# Altium PCB DIO_RJ45_DIOT.PCBDOC (part 6 of 6)
Units mil, origin at the board's own origin, x right, y up, seen from the top; angles counter-clockwise.
Board outline 8758.72 x 3941.04 mil, 4 copper layers (TopLayer, MidLayer1, Internal Plane 1, BottomLayer), stack 46.562 mil thick; 318 components, 196 nets, 1276 pads, 687 vias.
Unrouted connection lines stored in the file: 2.
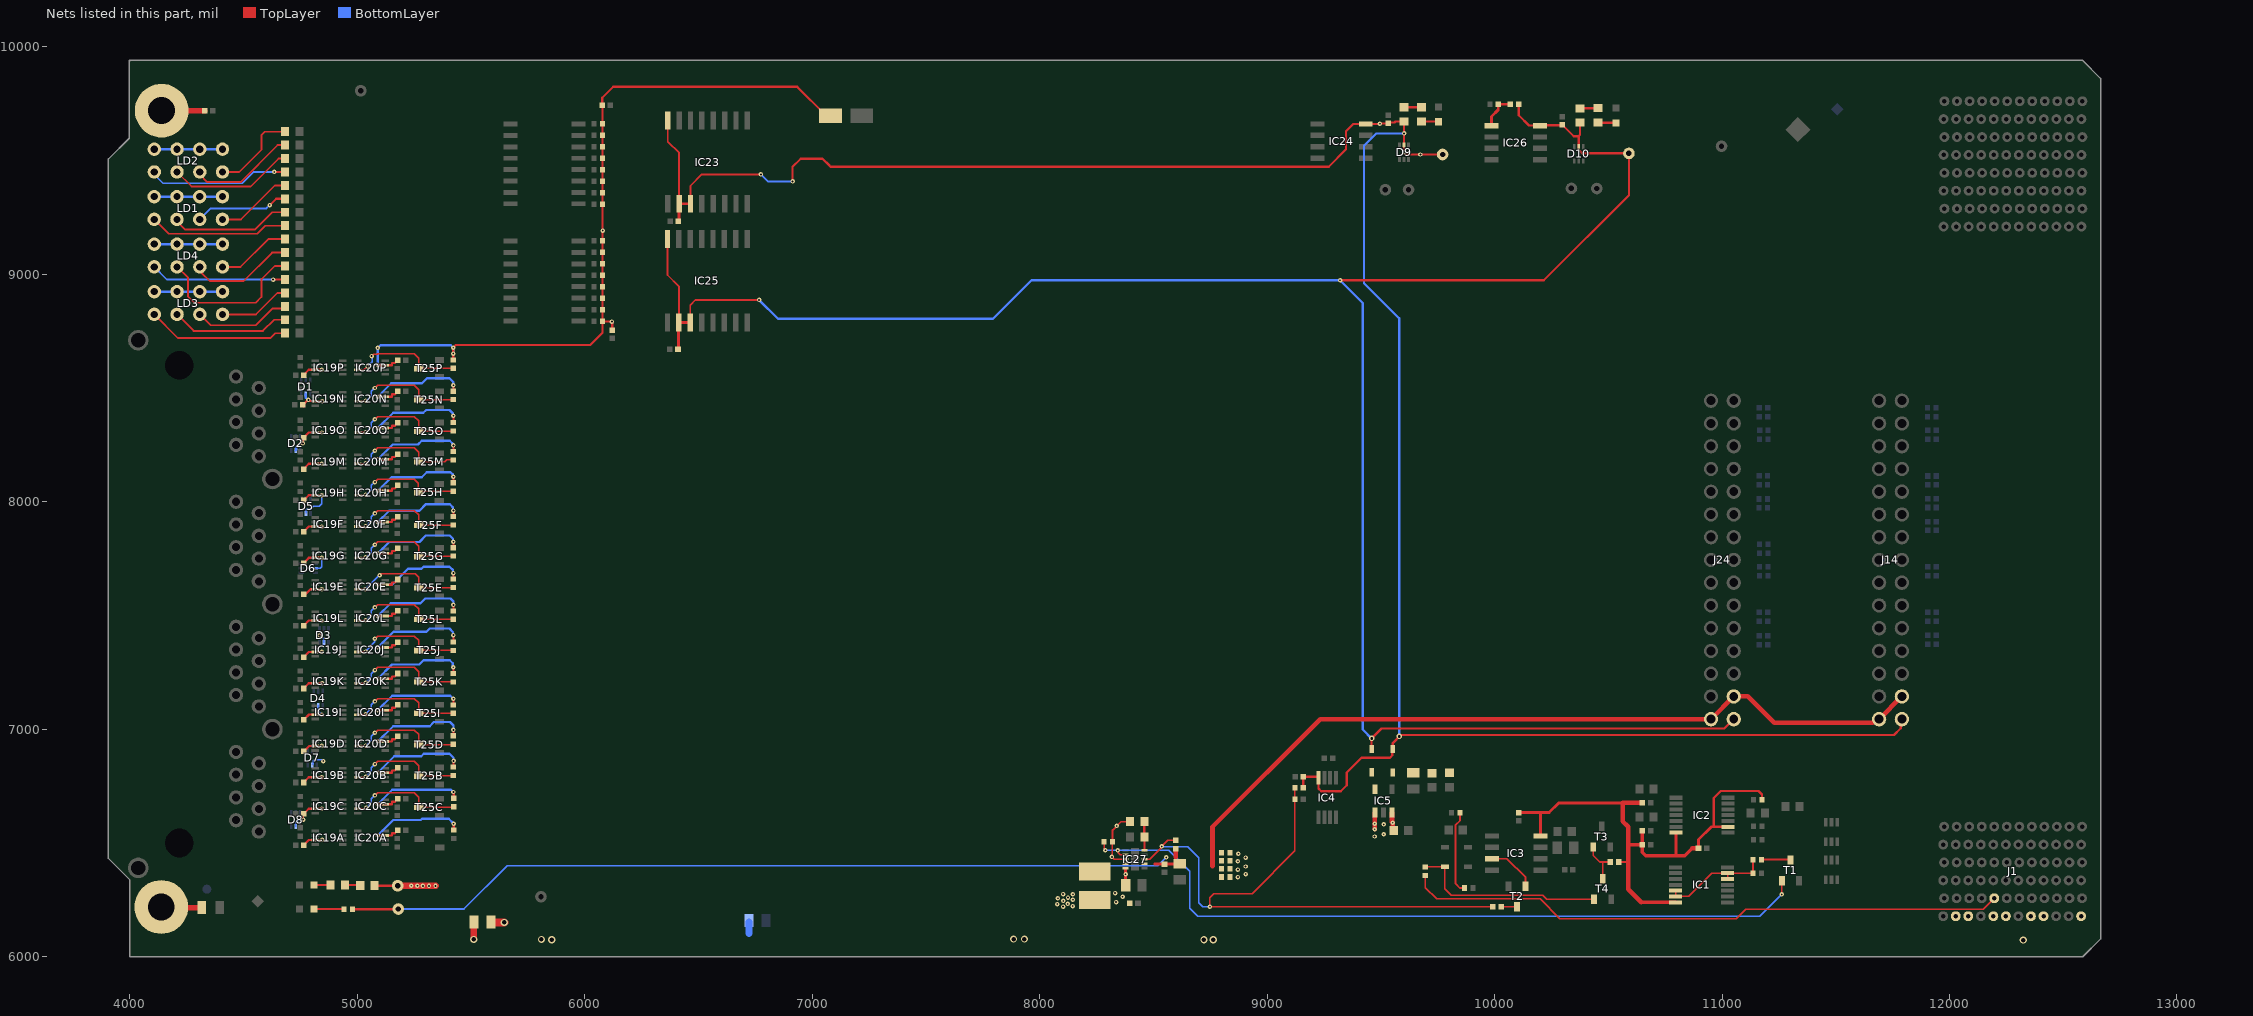
[diagram p7: the nets of this part, all layers, seen from the top]

## Via types
v1: diameter 19.68, hole 7.87, TopLayer to BottomLayer, tented both sides, 672 vias
v2: diameter 31.5, hole 19.68, TopLayer to BottomLayer, 10 vias
v3: diameter 23.62, hole 11.81, TopLayer to BottomLayer, tented both sides, 5 vias

## Nets (pads, with @x,y where several pads share a name; then routed paths per layer and width w, separated by ;. In a path a pad name is that pad's centre, name@x,y a point inside that pad or via, vN(x,y) a via of type N, cw(c..) or ccw(c..) an arc to the next point about the centre after c; other vN are vias at no path point) (continued)
NetIC20B_3: IC20B.3 R133B.1 T25B.3 | length 502.2
  TopLayer w6: IC20B.3@5002.1,6787.79 5035.28,6787.79 v1(5037.13,6789.63) ; v1(5078.13,6845.63) 5090.13,6857.63 5252.13,6857.63 5270.85,6838.91 T25B.3@5270.85,6804.63 ; T25B.3@5271.5,6794.04 R133B.1@5425.2,6794.04
  BottomLayer w6: v1(5037.13,6789.63) 5062.97,6815.47 5062.97,6830.47 v1(5078.13,6845.63)
NetIC20C_3: IC20C.3 R133C.1 T25C.3 | length 502.4
  TopLayer w6: IC20C.3@5002.1,6649.99 5035.82,6649.99 v1(5039.36,6653.53) ; v1(5078.13,6707.83) 5090.13,6719.83 5252.13,6719.83 5270.85,6701.11 T25C.3@5270.85,6666.83 ; T25C.3@5271.62,6656.12 R133C.1@5425.2,6656.12
  BottomLayer w6: v1(5039.36,6653.53) 5062.97,6677.14 5062.97,6692.68 v1(5078.13,6707.83)
NetIC20D_3: IC20D.3 R133D.1 T25D.3 | length 502.2
  TopLayer w6: IC20D.3@5002.1,6925.58 5035.28,6925.58 v1(5037.13,6927.43) ; v1(5078.13,6983.43) 5090.13,6995.43 5252.13,6995.43 5270.85,6976.7 T25D.3@5270.85,6942.43 ; T25D.3@5271.5,6931.83 R133D.1@5425.2,6931.83
  BottomLayer w6: v1(5037.13,6927.43) 5062.97,6953.27 5062.97,6968.27 v1(5078.13,6983.43)
NetIC20E_3: IC20E.3 R133E.1 T25E.3 | length 502.8
  TopLayer w6: IC20E.3@5002.1,7614.56 v1(5035.28,7614.56) ; v1(5098.43,7675.58) 5104.42,7681.58 5256.41,7681.58 5271.5,7666.5 T25E.3@5271.5,7620.81 R133E.1@5425.2,7620.81
  BottomLayer w6: v1(5035.28,7614.56) 5096.31,7675.58 v1(5098.43,7675.58)
NetIC20F_3: IC20F.3 R133F.1 T25F.3 | length 501.8
  TopLayer w6: IC20F.3@5002.1,7890.15 5035.28,7890.15 v1(5037.13,7891.99) ; v1(5078.13,7947.99) 5090.13,7959.99 5252.13,7959.99 5270.85,7941.27 T25F.3@5270.85,7906.99 ; T25F.3@5271.5,7896.4 R133F.1@5422.87,7896.4
  BottomLayer w6: v1(5037.13,7891.99) 5040.48,7891.99 5062.97,7914.48 5062.97,7932.83 v1(5078.13,7947.99)
NetIC20G_3: IC20G.3 R133G.1 T25G.3 | length 501.9
  TopLayer w6: IC20G.3@5002.1,7752.35 5035.28,7752.35 v1(5037.13,7754.2) ; v1(5078.13,7810.2) 5090.13,7822.2 5252.13,7822.2 5270.85,7803.47 T25G.3@5270.85,7769.2 ; T25G.3@5271.5,7758.61 R133G.1@5422.98,7758.61
  BottomLayer w6: v1(5037.13,7754.2) 5040.48,7754.2 5062.97,7776.68 5062.97,7795.04 v1(5078.13,7810.2)
NetIC20H_3: IC20H.3 R133H.1 T25H.3 | length 510.8
  TopLayer w6: IC20H.3@5002.1,8027.94 5035.28,8027.94 v1(5037.13,8029.79) ; v1(5078.13,8085.79) 5090.13,8097.79 5252.13,8097.79 5269.68,8080.23 T25H.3@5269.68,8040.35 ; T25H.3@5271.5,8034.2 5279.37,8034.2 5290.65,8045.47 R133H.1@5423.23,8045.47
  BottomLayer w6: v1(5037.13,8029.79) 5040.48,8029.79 5062.97,8052.27 5062.97,8070.63 v1(5078.13,8085.79)
NetIC20I_3: IC20I.3 R133I.1 T25I.3 | length 502.2
  TopLayer w6: IC20I.3@5002.1,7063.38 5035.28,7063.38 v1(5037.13,7065.22) ; v1(5078.13,7121.22) 5090.13,7133.22 5252.13,7133.22 5270.85,7114.5 T25I.3@5270.85,7080.22 ; T25I.3@5271.5,7069.63 R133I.1@5425.2,7069.63
  BottomLayer w6: v1(5037.13,7065.22) 5054.13,7082.23 5062.97,7091.06 5062.97,7106.06 v1(5078.13,7121.22)
NetIC20J_3: IC20J.3 R133J.1 T25J.3 | length 500.2
  TopLayer w6: IC20J.3@5002.1,7338.97 v1@5035.28,7338.97 ; v1(5078.13,7396.81) 5090.13,7408.81 5252.13,7408.81 5270.85,7390.09 5270.85,7355.81 T25J.3@5271.5,7355.81 ; T25J.3@5271.5,7345.22 R133J.1@5425.2,7345.22
  BottomLayer w6: v1(5037.13,7340.81) 5037.13,7342.5 5078.13,7383.5 v1(5078.13,7396.81)
NetIC20K_3: IC20K.3 R133K.1 T25K.3 | length 502.2
  TopLayer w6: IC20K.3@5002.1,7201.17 5035.28,7201.17 v1(5037.13,7203.02) ; v1(5078.13,7259.02) 5090.13,7271.02 5252.13,7271.02 5270.85,7252.29 T25K.3@5270.85,7218.02 ; T25K.3@5271.5,7207.43 R133K.1@5425.2,7207.43
  BottomLayer w6: v1(5037.13,7203.02) 5062.97,7228.86 5062.97,7243.86 v1(5078.13,7259.02)
NetIC20L_3: IC20L.3 R133L.1 T25L.3 | length 504.2
  TopLayer w6: IC20L.3@5002.1,7476.76 5035.28,7476.76 v1(5037.13,7478.61) ; v1(5078.13,7534.61) 5090.13,7546.61 5252.13,7546.61 5270.85,7527.88 T25L.3@5270.85,7493.61 ; T25L.3@5271.5,7483.02 R133L.1@5425.2,7483.02
  BottomLayer w6: v1(5037.13,7478.61) 5040.48,7478.61 5062.97,7501.09 5062.97,7519.45 v1(5078.13,7534.61)
NetIC20M_3: IC20M.3 R133M.1 T25M.3 | length 512.8
  TopLayer w6: IC20M.3@5002.1,8165.74 5035.28,8165.74 v1(5037.13,8167.58) ; v1(5078.13,8223.58) 5090.13,8235.58 5252.13,8235.58 5270.85,8216.86 T25M.3@5270.85,8175.2 ; T25M.3@5271.65,8175.2 5385.83,8175.2 5393.9,8183.27 R133M.1@5423.23,8183.27
  BottomLayer w6: v1(5037.13,8167.58) 5040.48,8167.58 5062.97,8190.07 5062.97,8208.43 v1(5078.13,8223.58)
NetIC20N_3: IC20N.3 R133N.1 T25N.3 | length 504.2
  TopLayer w6: IC20N.3@5002.1,8441.33 5035.28,8441.33 v1(5037.13,8443.17) ; v1(5078.13,8499.17) 5090.13,8511.17 5252.13,8511.17 5270.85,8492.45 T25N.3@5270.85,8458.17 ; T25N.3@5271.5,8447.58 R133N.1@5425.2,8447.58
  BottomLayer w6: v1(5037.13,8443.17) 5040.48,8443.17 5062.97,8465.66 5062.97,8484.02 v1(5078.13,8499.17)
NetIC20O_3: IC20O.3 R133O.1 T25O.3 | length 504.2
  TopLayer w6: IC20O.3@5002.1,8303.54 5035.28,8303.54 v1(5037.13,8305.38) ; v1(5078.13,8361.38) 5090.13,8373.38 5252.13,8373.38 5270.85,8354.65 T25O.3@5270.85,8320.38 ; T25O.3@5271.5,8309.79 R133O.1@5425.2,8309.79
  BottomLayer w6: v1(5037.13,8305.38) 5040.48,8305.38 5062.97,8327.86 5062.97,8346.22 v1(5078.13,8361.38)
NetIC20P_3: IC20P.3 R133P.1 T25P.3 | length 512.3
  TopLayer w6: IC20P.3@5002.1,8579.13 5029.07,8579.13 5043.49,8593.55 v1(5045.53,8593.55) ; v1(5063.22,8639.37) 5066.92,8639.37 5073.97,8646.41 5087.57,8646.41 5090.13,8648.97 5252.13,8648.97 5270.85,8630.24 T25P.3@5270.85,8595.97 ; T25P.3@5271.5,8585.38 R133P.1@5425.2,8585.38
  BottomLayer w6: v1(5045.53,8593.55) 5066.13,8614.14 5066.13,8620.75 5065.83,8621.04 5065.83,8636.75 v1(5063.22,8639.37)
NetIC26_1: IC26.1 R61.1 R68.1 | length 159.3
  TopLayer w12: IC26.1@9986.51,9652.76 9986.51,9692.22 10016.54,9722.24 R68.1@10016.54,9747.05 R61.1@10069.09,9747.05
NetIC27_5: IC27.5 R121.1 R122.2 | length 125.8
  TopLayer w10: R121.1@8460.63,6592.52 R122.2@8460.63,6525.27 8460.94,6524.95 IC27.5@8460.94,6466.83
NetIC27_9: IC27.9 L2.1
NetJ1_H2: J1.H2 R41.2 | length 2648.7
  TopLayer w6: R41.2@9695.87,6356.5 9695.87,6302.17 9745.08,6252.95 10200.79,6252.95 10287.4,6166.34 11018.7,6166.34 11062.01,6166.34 11103.35,6207.68 12148.62,6207.68 J1.H2@12196.85,6255.91
NetLD1_1: LD1.1 R89.1 | length 616.3
  TopLayer w8: LD1.1@4107.87,9240.35 4171.35,9176.87 4561.28,9176.87 4597,9212.6 R89.1@4683.07,9212.6
NetLD1_3: LD1.3 R91.1 | length 530.3
  TopLayer w8: LD1.3@4207.87,9240.35 4207.87,9231.57 4243.72,9195.73 4550.07,9195.73 4626,9271.65 R91.1@4683.07,9271.65
NetLD1_5: LD1.5 R93.1 | length 412.2
  TopLayer w8: v1@4616.79,9302.5 4645,9330.71
  TopLayer w10: 4645,9330.71 R93.1@4683.07,9330.71
  BottomLayer w8: LD1.5@4307.87,9240.35 4355.91,9288.39 4601.38,9288.39 v1(4616.14,9303.15)
NetLD1_7: LD1.7 R95.1 | length 337.1
  TopLayer w8: LD1.7@4407.87,9240.35 4489.57,9240.35 4638.98,9389.76 R95.1@4683.07,9389.76
NetLD2_1: LD2.1 R97.1 | length 622.2
  TopLayer w10: v1(4636,9449) 4636.18,9448.82 R97.1@4683.07,9448.82
  BottomLayer w8: LD2.1@4108.27,9448.82 4108.27,9437.82 4146.48,9399.61 4495.27,9399.61 4544.66,9449 v1(4636,9449)
NetLD2_3: LD2.3 R99.1 | length 552.3
  TopLayer w8: LD2.3@4208.27,9448.82 4272.24,9384.84 4531.97,9384.84 4655,9507.87 R99.1@4683.07,9507.87
NetLD2_5: LD2.5 R101.1 | length 466.9
  TopLayer w8: LD2.5@4308.27,9448.82 4308.27,9437.82 4341.56,9404.53 4487.6,9404.53 4650,9566.93 R101.1@4683.07,9566.93
NetLD2_7: LD2.7 R103.1 | length 386.3
  TopLayer w8: LD2.7@4408.27,9448.82 4481.3,9448.82 4580,9547.52 4580,9612.5 4593.48,9625.98 R103.1@4683.07,9625.98
NetLD3_1: LD3.1 R105.1 | length 626.9
  TopLayer w8: LD3.1@4108.34,8822.77 4212.61,8718.5 4618.11,8718.5 4639.76,8740.16 R105.1@4683.07,8740.16
NetLD3_3: LD3.3 R107.1 | length 525.3
  TopLayer w8: LD3.3@4208.34,8822.77 4281.11,8750 4585.79,8750 4635,8799.21 R107.1@4683.07,8799.21
NetLD3_5: LD3.5 R109.1 | length 429.2
  TopLayer w8: LD3.5@4308.42,8822.69 4356.5,8774.61 4555.12,8774.61 4629.35,8848.84 4673.64,8848.84 R109.1@4683.07,8858.27
NetLD3_7: LD3.7 R111.1 | length 313.9
  TopLayer w8: LD3.7@4408.34,8822.77 4555.45,8822.77 4650,8917.32 R111.1@4683.07,8917.32
NetLD4_1: LD4.1 R113.1 | length 598.7
  TopLayer w8: v1@4630.38,8976.38 R113.1@4683.07,8976.38
  TopLayer w10: v1@4630.38,8976.38 v1(4630.76,8976)
  BottomLayer w8: LD4.1@4108.27,9031.5 4163.76,8976 v1(4630.76,8976)
NetLD4_3: LD4.3 R115.1 | length 700.9
  TopLayer w8: LD4.3@4208.27,9031.5 4256.89,8982.87 4256.89,8900.43 4283.3,8874.02 4554.13,8874.02 4579.72,8899.61 4579.72,8977.66 4637.5,9035.43 R115.1@4683.07,9035.43
NetLD4_5: LD4.5 R117.1 | length 462.8
  TopLayer w8: LD4.5@4308.27,9031.5 4317.65,9022.11 4317.65,9004.2 4352.43,8969.43 4500.94,8969.43 4626,9094.49 R117.1@4683.07,9094.49
NetLD4_7: LD4.7 R119.1 | length 325.4
  TopLayer w8: LD4.7@4408.27,9031.5 4487.4,9031.5 4609.45,9153.54 R119.1@4683.07,9153.54
NetLD5_2: LD5.2 R1.1 | length 131.1
  TopLayer w10: LD5.2@4811.02,6208.66 R1.1@4942.13,6208.66
NetLD6_2: LD6.2 R3.2 | length 73.8
  TopLayer w10: LD6.2@4811.02,6313.98 R3.2@4884.84,6313.98
NetLD7_2: LD7.2 R5.2 | length 78.6
  TopLayer w12: R5.2@10455.71,9666.34 10456.69,9665.35 10532.48,9665.35 LD7.2@10533.46,9664.37
NetLD8_2: LD8.2 R7.2 | length 75.2
  TopLayer w10: R7.2@9679.13,9670.28 9752.95,9670.28 LD8.2@9753.94,9669.29
NetR2_2: R2.2 R3.1 | length 55.1
  TopLayer w10: R3.1@4947.83,6313.98 R2.2@5002.95,6313.98
NetR4_2: R4.2 R5.1 | length 80.1
  TopLayer w12: R4.2@10375.98,9728.35 10376.48,9728.84 10455.22,9728.84 R5.1@10455.71,9729.33
NetR6_2: R6.2 R7.1 | length 76.8
  TopLayer w10: R6.2@9602.36,9733.27 R7.1@9679.13,9733.27
NetR45_1: R45.1 T1.3 | length 129.8
  TopLayer w8: R45.1@11169.09,6424.21 R45.1@11169.09,6425 ; R45.1@11173.03,6426.18 T1.3@11299.21,6426.18 ; T1.3@11295.28,6435.04 T1.3@11297.24,6433.07
NetR53_2: R53.2 T2.3 | length 71.5
  TopLayer w8: R53.2@10030.32,6219.49 R53.2@10029.33,6218.5 T2.3@10099.41,6218.5
NetR58_1: R58.1 T3.1 T4.3 | length 197.1
  TopLayer w8: T3.1@10434.06,6481.3 10434.06,6443.9 10462.6,6415.35 10475.39,6415.35 ; T4.3@10475.39,6342.52 10475.39,6415.35 ; R58.1@10509.06,6415.35 10475.39,6415.35
P3V3: B10.1 C46A.2 C46B.2 C46C.2 C46D.2 C46E.2 C46F.2 C46G.2 C46H.2 C46I.2 C46J.2 C46K.2 C46L.2 C46M.2 C46N.2 C46O.2 C46P.2 C47A.2 C47B.2 C47C.2 C47D.2 C47E.2 C47F.2 C47G.2 C47H.2 C47I.2 C47J.2 C47K.2 C47L.2 C47M.2 C47N.2 C47O.2 C47P.2 C60.2 C61.2 C62.1 C65.2 C66.2 D1.5 D2.5 D3.5 D4.5 D5.5 D6.5 D7.5 D8.5 IC19A.7 IC19B.7 IC19C.7 IC19D.7 IC19E.7 IC19F.7 IC19G.7 IC19H.7 IC19I.7 IC19J.7 IC19K.7 IC19L.7 IC19M.7 IC19N.7 IC19O.7 IC19P.7 IC20A.7 IC20B.7 IC20C.7 IC20D.7 IC20E.7 IC20F.7 IC20G.7 IC20H.7 IC20I.7 IC20J.7 IC20K.7 IC20L.7 IC20M.7 IC20N.7 IC20O.7 IC20P.7 IC27.8 IC27.10 L2.2 LD1.2 LD1.4 LD1.6 LD1.8 LD2.2 LD2.4 LD2.6 LD2.8 LD3.2 LD3.4 LD3.6 LD3.8 LD4.2 LD4.4 LD4.6 LD4.8 R2.1 R57.2 R90.2 R92.2 R94.2 R96.2 R98.2 R100.2 R102.2 R104.2 R106.2 R108.2 R110.2 R112.2 R114.2 R116.2 R118.2 R120.2 R121.2 R133A.2 R133B.2 R133C.2 R133D.2 R133E.2 R133F.2 R133G.2 R133H.2 R133I.2 R133J.2 R133K.2 R133L.2 R133M.2 R133N.2 R133O.2 R133P.2 | length 14976.8
  TopLayer w6: v1(4763.59,6601.99) 4763.59,6625.74 C47C.2@4764.84,6626.99
  TopLayer w8: R57.2@8320.67,6503.94 8319.63,6502.9 8319.63,6439.76 v1(8317.9,6438.03) 8317.9,6437.76 8328.43,6427.24 IC27.8@8378.04,6427.24 ; R57.2@8320.87,6503.94 8320.87,6555.53 8357.86,6592.52 R121.2@8397.64,6592.52
  TopLayer w10: LD2.2@4104.2,9552.23 LD2.2@4109.84,9557.87 ; v1(4761.62,8255.54) 4761.62,8277.32 4787.84,8303.54 v1(4844.28,8303.54) ; C47N.2@4761.81,8424.89 4781.82,8444.9 v1@4783.23,8444.9 ; C47A.2@4764.84,6489.2 4782.95,6507.31 4787.84,6512.2 IC19A.7@4815.1,6512.2 v1(4846.68,6512.2) ; C47C.2@4764.84,6626.99 4787.84,6649.99 IC19C.7@4815.1,6649.99 v1(4844.28,6649.99) ; C47B.2@4764.84,6764.79 4787.84,6787.79 v1(4844.28,6787.79) ; C47D.2@4764.84,6902.58 4766.32,6902.58 4789.32,6925.58 IC19D.7@4815.1,6925.58 v1(4844.28,6925.58) ; C47I.2@4764.84,7040.38 4765.72,7040.38 4788.72,7063.38 IC19I.7@4815.1,7063.38 v1(4844.28,7063.38) ; C47K.2@4764.84,7178.17 4787.84,7201.17 IC19K.7@4815.1,7201.17 v1(4846.68,7201.17) ; C47J.2@4764.84,7315.97 4787.84,7338.97 IC19J.7@4815.1,7338.97 v1(4844.28,7338.97) ; C47L.2@4764.84,7453.76 4787.84,7476.76 IC19L.7@4815.1,7476.76 v1(4844.28,7476.76) ; C47E.2@4764.84,7591.56 4771.61,7591.56 4794.61,7614.56 IC19E.7@4815.1,7614.56 v1(4844.28,7614.56) ; C47G.2@4764.84,7729.35 4787.84,7752.35 v1(4844.28,7752.35) ; C47F.2@4764.84,7867.15 4787.84,7890.15 IC19F.7@4815.1,7890.15 v1(4844.28,7890.15) ; C47H.2@4764.84,8004.94 4787.84,8027.94 IC19H.7@4815.1,8027.94 v1(4844.28,8027.94) ; C47M.2@4764.84,8142.74 4787.84,8165.74 IC19M.7@4815.1,8165.74 v1(4844.28,8165.74) ; C47N.2@4764.84,8418.33 C47N.2@4766.61,8420.09 ; C47P.2@4764.84,8556.13 4787.84,8579.13 IC19P.7@4815.1,8579.13 v1(4844.28,8579.13) ; v1(4786.05,8446.83) 4788.67,8446.83 4793.27,8442.24 4814.2,8442.24 IC19N.7@4815.1,8441.33 4815.79,8440.65 4846.76,8440.65 v1(4847.44,8439.96) ; R2.1@5076.77,6312.01 5077.76,6311.02 B10.1@5178.15,6311.02 ; v1(5090.97,6531.88) IC20A.7@5124.15,6531.88 5152.92,6531.88 5152.92,6541.96 5165.33,6541.96 C46A.2@5178.41,6555.04 ; v1(5090.97,6669.68) IC20C.7@5124.15,6669.68 5152.92,6669.68 5152.92,6679.76 5165.33,6679.76 C46C.2@5178.41,6692.83 ; v1(5090.97,6807.47) IC20B.7@5124.15,6807.47 5152.92,6807.47 5152.92,6817.55 5165.33,6817.55 C46B.2@5178.41,6830.63 ; v1(5090.97,6945.27) IC20D.7@5124.15,6945.27 5152.92,6945.27 5152.92,6955.35 5165.33,6955.35 C46D.2@5178.41,6968.43 ; v1(5090.97,7083.06) IC20I.7@5124.15,7083.06 5152.92,7083.06 5152.92,7093.14 5165.33,7093.14 C46I.2@5178.41,7106.22 ; v1(5090.97,7220.86) IC20K.7@5124.15,7220.86 5152.92,7220.86 5152.92,7230.94 5165.33,7230.94 C46K.2@5178.41,7244.02 ; v1(5090.97,7358.65) IC20J.7@5124.15,7358.65 5152.92,7358.65 5152.92,7368.73 5165.33,7368.73 C46J.2@5178.41,7381.81 ; v1(5090.97,7496.45) IC20L.7@5124.15,7496.45 5152.92,7496.45 5152.92,7506.53 5165.33,7506.53 C46L.2@5178.41,7519.61 ; v1(5090.97,7634.24) IC20E.7@5124.15,7634.24 5152.92,7634.24 5152.92,7644.32 5165.33,7644.32 C46E.2@5178.41,7657.4 ; v1(5090.97,7772.04) IC20G.7@5124.15,7772.04 5152.92,7772.04 5152.92,7782.12 5165.33,7782.12 C46G.2@5178.41,7795.2 ; v1(5090.97,7909.83) IC20F.7@5124.15,7909.83 5152.92,7909.83 5152.92,7919.91 5165.33,7919.91 C46F.2@5178.41,7932.99 ; v1(5090.97,8047.63) IC20H.7@5124.15,8047.63 5152.92,8047.63 5152.92,8057.71 5165.33,8057.71 C46H.2@5178.41,8070.79 ; v1(5090.97,8185.43) IC20M.7@5124.15,8185.43 5152.92,8185.43 5152.92,8195.5 5165.33,8195.5 C46M.2@5178.41,8208.58 ; v1(5090.97,8323.22) 5152.92,8323.22 5152.92,8333.3 5165.33,8333.3 C46O.2@5178.41,8346.38 ; v1(5090.97,8461.02) IC20N.7@5124.15,8461.02 5152.92,8461.02 5152.92,8471.09 5165.33,8471.09 C46N.2@5178.41,8484.17 ; v1(5090.97,8598.81) IC20P.7@5124.15,8598.81 5152.92,8598.81 5152.92,8608.89 5165.33,8608.89 C46P.2@5178.41,8621.97 ; v1(5422.23,7271.39) 5423.23,7270.39 R133K.2@5423.23,7243.9 ; v1(5423.21,6723.17) 5424.21,6722.17 R133C.2@5424.21,6695.67 ; R133I.2@5423.23,7106.1 v1(5423.22,7132.88) ; R133B.2@5423.23,6832.48 5423.71,6832.97 v1(5423.71,6859.49) ; R133D.2@5423.23,6970.27 5423.47,6970.52 v1(5423.47,6996.04) ; R133J.2@5423.23,7382.68 5423.32,7382.77 5423.32,7412.67 v1(5423.41,7412.76) ; R133L.2@5423.23,7519.49 5423.32,7519.58 5423.32,7545.71 v1(5423.41,7545.8) ; R133E.2@5423.23,7659.25 5423.32,7659.34 5423.32,7685.31 v1(5423.41,7685.4) ; R133G.2@5423.23,7797.05 v1(5423.23,7823.54) ; R133F.2@5423.23,7933.86 v1(5423.23,7960.35) ; R133H.2@5423.23,8082.48 v1(5423.23,8108.98) ; R133M.2@5423.23,8220.28 v1(5423.23,8246.77) ; R133O.2@5423.23,8347.24 v1(5423.23,8376.97) ; R133N.2@5423.23,8485.04 v1(5423.23,8511.53) ; R133P.2@5423.23,8622.83 5422.23,8623.83 v1(5422.23,8675.98) 5433.94,8687.69 6024.3,8687.69 6078.54,8741.93 R106.2@6078.54,8792.32 ; v1(5424.2,6583.4) 5425.2,6582.4 R133A.2@5425.2,6555.9 ; C61.2@6077.76,9741.14 6077.76,9775.59 6125.82,9823.65 6934.22,9823.65 7062.01,9695.87 C62.1@7080.71,9695.87 C62.1@7098.55,9695.87 ; v1@6078.54,9189.76 R90.2@6078.54,9307.09 R92.2@6078.54,9357.7 R94.2@6078.54,9408.33 R96.2@6078.54,9458.94 R98.2@6078.54,9509.56 R100.2@6078.54,9560.18 R102.2@6078.54,9610.8 R104.2@6078.54,9661.42 C61.2@6078.54,9741.14 ; v1(6079.72,9190.94) 6079.13,9190.35 6079.13,9147.24 R120.2@6078.54,9146.65 R118.2@6078.54,9096.03 R116.2@6078.54,9045.42 R114.2@6078.54,8994.8 R112.2@6078.54,8944.18 R110.2@6078.54,8893.56 R108.2@6078.54,8842.94 R106.2@6078.54,8792.32 ; C60.2@6121.06,8753.94 6121.06,8790.22 v1(6120.06,8791.22) 6079.65,8791.22 R106.2@6078.54,8792.32
  TopLayer w12: C66.2@8378.26,6334.65 IC27.10@8378.26,6388.09
  TopLayer w15: C66.2@8378.26,6334.65 8378.88,6334.03 8378.88,6314.6 C66.2@8379.49,6313.99
  TopLayer w20: v1(5344.49,6310.04) v1@5347.44,6307.09
  TopLayer w30: B10.1@5178.15,6311.02 v1(5238.19,6311.02) v1(5264.76,6311.02) v1@5344.49,6311.02
  BottomLayer w6: D8.5@4730.13,6570.89 4730.13,6588.21 4743.9,6601.99 v1(4763.59,6601.99) ; D5.5@4775.59,7948.23 4775.59,7963.67 4780.37,7968.45 4795.81,7968.45 4806.69,7979.33 4833.66,7979.33 4844.28,7989.95 v1(4844.28,8027.94) ; D7.5@4802.17,6841.93 4806.94,6846.71 4806.94,6862.15 4815.89,6862.15 4818.9,6865.16 4845.47,6865.16 v1(4851.38,6859.25) ; D6.5@4816.72,7707.23 4837.15,7707.23 4844.28,7714.36 v1(4844.28,7752.35) ; D4.5@4828.74,7103.74 4828.74,7078.92 v1(4844.28,7063.38) ; v1(4834.65,7411.42) 4839.57,7411.42 4854.33,7396.65 D3.5@4854.33,7380.31
  BottomLayer w10: LD1.2@4107.87,9340.35 LD1.4@4207.87,9340.35 LD1.6@4307.87,9340.35 LD1.8@4407.87,9340.35 ; LD4.2@4108.27,9131.5 LD4.4@4208.27,9131.5 LD4.6@4308.27,9131.5 LD4.8@4408.27,9131.5 ; LD2.2@4108.27,9548.82 LD2.4@4208.27,9548.82 LD2.6@4308.27,9548.82 LD2.8@4408.27,9548.82 ; LD3.2@4108.34,8922.77 LD3.4@4208.34,8922.77 LD3.6@4308.34,8922.77 LD3.8@4408.34,8922.77 ; D2.5@4730.13,8224.43 4732.91,8227.21 4732.91,8240.21 4748.23,8255.54 v1(4761.62,8255.54) ; D1.5@4773.62,8472.83 4774.53,8471.93 4774.53,8456.23 4783.92,8446.83 v1(4786.05,8446.83) ; v1(5090.97,6531.88) 5159.08,6599.99 5279.56,6599.99 5285.04,6605.47 5402.9,6605.47 5424.2,6584.18 v1(5424.2,6583.4) ; v1(5090.97,6669.68) 5154.56,6733.27 5412.51,6733.27 5422.61,6723.17 v1(5423.21,6723.17) ; v1(5090.97,6807.47) 5163.28,6879.78 5282.33,6879.78 5293.3,6890.75 5406.5,6890.75 5423.17,6874.08 5423.17,6860.04 v1(5423.71,6859.49) ; v1(5090.97,6945.27) 5158.24,7012.54 5318.74,7012.54 5336.71,7030.51 5408.46,7030.51 5423.47,7015.51 v1(5423.47,6996.04) ; v1(5090.97,7083.06) 5154.56,7146.65 5409.45,7146.65 v1(5423.22,7132.88) ; v1(5090.97,7220.86) 5153.69,7283.58 5272.75,7283.58 5291.33,7302.17 5407.48,7302.17 5420.38,7289.27 5420.38,7273.25 v1(5422.23,7271.39) ; v1(5090.97,7358.65) 5160.21,7427.9 5304.96,7427.9 5318.99,7441.93 5405.51,7441.93 5421.56,7425.88 5421.56,7414.62 v1(5423.41,7412.76) ; v1(5090.97,7496.45) 5147.67,7553.15 5278.54,7553.15 5299.21,7573.82 5410.43,7573.82 5423.36,7560.89 5423.36,7545.85 v1(5423.41,7545.8) ; v1(5090.97,7634.24) 5153.13,7634.24 5223.12,7704.24 5282.66,7704.24 5292,7713.58 5406.5,7713.58 5421.56,7698.52 5421.56,7687.25 v1(5423.41,7685.4) ; v1(5090.97,7772.04) 5141.12,7822.2 5273.87,7822.2 5302.07,7850.39 5407.48,7850.39 5421.38,7836.5 5421.38,7825.4 v1(5423.23,7823.54) ; v1(5090.97,7909.83) 5141.13,7959.99 5273.87,7959.99 5302.53,7988.66 5407.01,7988.66 5418.31,7977.36 5418.31,7976.66 5421.38,7973.59 5421.38,7962.21 v1(5423.23,7960.35) ; v1(5090.97,8047.63) 5150.62,8107.28 5284.32,8107.28 5306.05,8129.01 5410.68,8129.01 5421.38,8118.31 5421.38,8110.83 v1(5423.23,8108.98) ; v1(5090.97,8185.43) 5156.27,8250.73 5267.56,8250.73 5284.17,8267.34 5407.34,8267.34 5418.39,8256.3 5418.39,8254.23 5423.23,8249.39 v1(5423.23,8246.77) ; v1(5090.97,8323.22) 5158.24,8390.5 5291.18,8390.5 5303.42,8402.74 5405.69,8402.74 5421.38,8387.05 5421.38,8378.82 v1(5423.23,8376.97) ; v1(5090.97,8461.02) 5149.64,8519.68 5285.08,8519.68 5307.4,8542 5406.46,8542 5422.51,8525.95 5422.51,8512.25 v1(5423.23,8511.53) ; v1(5090.97,8598.81) v1(5090.97,8675.39) 5102.68,8687.11 5411.1,8687.11 v1(5422.23,8675.98) v1(5422.23,8650.33)
  other v1: 8103.35,6219.49 8145.67,6221.46 8077.76,6230.31 8124.02,6231.3 8336.61,6239.17 8104.33,6244.09 8146.65,6249.02 8080.86,6256.45 8125,6258.86 8365.16,6262.8 8146.65,6273.62 8103.35,6274.61 8331.69,6278.54 5289.37,6310.04 5315.94,6310.04 8378.26,6361.37 8339.53,6574.19
P3V3_CPCIS: C4.2 C5.2 C8.2 C24.2 C25.2 D15.2 D16.2 IC1.14 IC2.2 IC2.14 IC3.8 IC5.5 R46.2 R47.1 R50.1 R52.1 R54.2 R56.1 R58.2 | length 2767.2
  TopLayer w8: R56.1@9848.2,6632.84 9848.2,6597.69 9828.74,6578.23 9828.74,6319.88 9847.48,6301.15 R54.2@9868.28,6301.15 ; R58.2@10546.06,6415.35 10586.61,6415.35 10587.6,6416.34
  TopLayer w10: 10963.58,6569.88 10963.58,6696.85 10994.09,6727.36 11160.39,6727.36 11175.98,6711.77 R52.1@11175.98,6689.96
  TopLayer w12: C8.2@10106.33,6632.77 10201.77,6632.77 ; IC3.8@10201.77,6529.72 10201.77,6632.77 ; 10562.77,6674.95 10282.23,6674.95 10240.06,6632.77 10201.77,6632.77 ; IC2.14@10798.23,6544.29 10798.23,6445.87 10801.18,6442.91 ; C5.2@10896.65,6477.36 10896.65,6513.78 10952.76,6569.88 10963.58,6569.88 IC2.2@11026.58,6569.88
  TopLayer w15: 10587.6,6491.14 10636.81,6491.14 ; R50.1@10649.8,6552.41 R47.1@10649.8,6491.14 10649.8,6457.48 10664.37,6442.91 10801.18,6442.91 10835.63,6442.91 10869.09,6476.38
  TopLayer w16: 10645.67,6238.19 IC1.14@10796.26,6238.19
  TopLayer w20: 10587.6,6366.14 10587.6,6416.34 10587.6,6491.14 10587.6,6569.88 10562.77,6594.71 10562.77,6674.95 10636.81,6674.95 ; 10587.86,6366.14 10587.86,6296 10645.67,6238.19 ; 10869.09,6476.38 C5.2@10896.65,6476.38 C5.2@10896.65,6477.36
P3V3_MP1: B8.1 C3.2 C57.2 C58.2 D9.5 D15.1 IC4.8 IC23.2 IC23.3 IC23.16 IC24.8 J14.30 R6.1 R69.2 | length 10123.1
  TopLayer w8: IC23.16@6365.35,9675.2 6365.35,9582.48 6415.35,9532.48 IC23.2@6415.35,9342.52 ; C57.2@6412.4,9231.3 C57.2@6415.35,9234.25 ; IC23.2@6415.35,9309.05 IC23.2@6415.35,9342.52 ; IC23.2@6421.26,9342.52 IC23.2@6415.35,9342.52 ; IC23.3@6465.35,9309.05 6465.35,9388.58 6514.76,9437.99 v1(6775.01,9437.99)
  TopLayer w10: v1@6915.35,9408.46 v1(6914.37,9407.48) 6914.37,9471.46 6949.8,9506.89 7046.26,9506.89 7073.82,9479.33 7080.95,9472.19 9271.41,9472.19 9347.44,9548.23 9347.44,9627.95 9379.13,9659.65 IC24.8@9434.06,9659.65 9434.45,9660.04 9495.67,9660.04 v1(9496.06,9660.43) 9497.05,9661.42 9532.48,9661.42 C58.2@9533.46,9662.4 9537.5,9666.44 9560.67,9666.44 9564.51,9670.28 R6.1@9602.36,9670.28 v1(9602.36,9618.41) D9.5@9602.36,9566.54 9602.36,9535.43 9612.2,9525.59 v1(9674.21,9525.59) B8.1@9771.65,9525.59 B8.1@9765.72,9531.53 ; R69.2@9159.25,6741.48 9158.86,6741.87 9158.86,6789.96 C3.2@9158.46,6790.35 9222.52,6790.35 9226.38,6786.5 IC4.8@9226.38,6785.43 9226.38,6738.48 9238.65,6726.21 9323.83,6726.21 9350.53,6752.91 9350.53,6808.94 9415.65,6874.05 9539.98,6874.05 9550.86,6884.93 9550.86,6909.13 D15.1@9553.15,6911.42 9553.15,6938.98 9587.6,6973.43 11755.91,6973.43 11785.37,7002.89 11785.37,7038.08 J14.30@11790.65,7043.37
  TopLayer w12: C57.2@6415.35,9234.25 IC23.2@6415.35,9309.05 IC23.3@6465.35,9309.05
  BottomLayer w8: v1@6773.62,9437.99 v1(6775.01,9437.99) 6805.52,9407.48 v1(6914.37,9407.48)
  BottomLayer w10: v3(9580.71,6967.52) 9580.71,8805.21 9426.18,8959.73 9426.18,9564.3 9480.29,9618.41 v1(9602.36,9618.41)
  other v1: 9603.11,9536.42
P3V3_MP2: B1.1 C63.2 C64.2 D10.5 D16.1 IC25.2 IC25.3 IC25.16 IC26.8 J24.30 R4.1 R61.2 | length 9667
  TopLayer w8: IC25.16@6364.37,9153.54 6364.37,8995.87 6414.37,8945.87 6414.37,8847.44 IC25.2@6414.37,8787.4 ; IC25.3@6464.37,8787.4 6464.57,8787.6 6464.57,8863.19 6487.51,8886.14 v1(6767.16,8886.14)
  TopLayer w10: v1(9320.87,8972.44) 10216.54,8972.44 10590.85,9346.75 B1.1@10590.85,9530.51 10386.22,9530.51 10370.17,9546.55 10370.17,9559.55 D10.5@10370.08,9559.65 10370.08,9606.25 ; D16.1@9459.65,6912.4 v3(9459.65,6958.66) 9502.81,7001.83 11010.18,7001.83 J24.30@11051.68,7043.33 ; R61.2@10106.1,9747.05 10106.1,9698.03 10151.38,9652.76 IC26.8@10199.11,9652.76 10200.98,9654.63 10296.36,9654.63 C64.2@10298.23,9656.5 10348.47,9606.25 10370.08,9606.25 ; R4.1@10375.98,9665.35 10375.98,9612.16 10370.08,9606.25
  TopLayer w12: C63.2@6410.43,8669.29 6412.4,8671.26 6412.4,8785.43 IC25.2@6414.37,8787.4 IC25.3@6464.37,8787.4
  BottomLayer w8: B1.1@10582.29,9533.46 B1.1@10588.05,9527.71
  BottomLayer w10: v1(6767.16,8886.14) 6850.15,8803.15 7795.28,8803.15 7964.57,8972.44 v1(9320.87,8972.44) 9420.28,8873.03 9420.28,6998.03 v3(9459.65,6958.66)
P12V0: B11.1 C67.2 C68.2 IC27.2 J14.28 J14.29 J24.28 J24.29 R1.2 R38.1 R44.1 R59.1 R60.1 R72.2 | length 7356
  TopLayer w6: R1.2@4979.13,6208.66 4979.63,6208.17 R1.2@4980.12,6207.68
  TopLayer w10: R1.2@4979.63,6208.17 B11.1@5181.1,6208.17
  TopLayer w12: 8506.89,6406.69 C67.2@8549.02,6406.69 ; C67.2@8549.21,6406.5 8614.17,6406.5 C68.2@8616.14,6408.46
  TopLayer w20: 8598.43,6436.02 R72.2@8598.43,6473.62 ; 8760.24,6397.82 8760.24,6570.21 9233.35,7043.33 J24.29@10951.68,7043.33 J24.28@11051.68,7143.33 11113.25,7143.33 11229.02,7027.56 11663.21,7027.56 11679.02,7043.37 J14.29@11690.65,7043.37 J14.28@11790.65,7143.37
  BottomLayer w8: B11.1@5181.1,6208.66 5469.49,6208.66 5659.45,6398.62 8519.8,6398.62 v1(8556.65,6435.47)
P12V0_CPCIS: C23.2 IC5.1 IC5.3 J1.A1 J1.D1 J1.E1 J1.G1 J1.H1 J1.J1 J1.K1 R38.2 R44.2 R59.2 R60.2 | length 157.2
  TopLayer w20: v1(9473.43,6559.06) 9474.41,6560.04 IC5.1@9474.41,6632.87 ; IC5.3@9549.21,6632.87 9549.21,6590.55 v1(9552.17,6587.6) 9552.17,6558.07 C23.2@9557.09,6553.15
  other v1: 8872.05,6349.41 8906.5,6362.2 8872.05,6381.89 8905.51,6395.67 8872.05,6418.31 8905.51,6434.71 8874.02,6451.77 9472.44,6527.56 9512.8,6537.4 9512.8,6580.71 9473.43,6583.66
PGOOD: IC27.7 R57.1 T1.1 | length 3375.7
  TopLayer w6: R57.1@8283.66,6503.94 8283.66,6473.23 v1(8289.37,6467.52) ; v1(8343.38,6466.27) 8346,6463.65 8346,6455 8353.85,6447.15 IC27.7@8378.26,6447.15 ; v1(11262.97,6273.15) 11262.97,6332.85 T1.1@11263.78,6333.66
  BottomLayer w6: v1(8289.37,6467.52) 8293.07,6467.52 8293.7,6466.89 8342.75,6466.89 v1(8343.38,6466.27) 8568.18,6466.27 8660.43,6374.02 8660.43,6212.6 8695.87,6177.17 11166.98,6177.17 v1(11262.97,6273.15)
PSU_EN: IC27.3 R53.1 R69.1 R70.2 R72.1 | length 2631
  TopLayer w6: IC27.3@8460.94,6427.46 8484.32,6427.46 8537.4,6480.54 v1(8537.4,6484.11) 8563.92,6510.63 R72.1@8598.43,6510.63 ; R69.1@9122.24,6741.48 R70.2@9122.24,6691.84 9122.24,6463.78 8934.06,6275.59 8765.75,6275.59 8749.02,6258.86 v1(8749.02,6218.5) R53.1@9992.32,6218.5
  BottomLayer w6: v1(8537.4,6484.11) 8538.25,6483.27 8650.59,6483.27 8699.8,6434.06 8699.8,6236.22 8717.52,6218.5 v1(8749.02,6218.5)
RST: IC3.3 T2.1 | length 220.1
  TopLayer w8: IC3.3@9989.17,6429.72 10054.53,6429.72 10136.81,6347.44 T2.1@10136.81,6309.06
RST_N: D13.1 R41.1 T4.1 | length 849.4
  TopLayer w6: R41.1@9695.87,6393.5 9695.95,6393.59 D13.1@9773.52,6393.59 ; D13.1@9781.47,6393.67 9781.47,6297.27 9809.06,6269.69 10212.6,6269.69 10230.31,6251.97 T4.1@10437.99,6251.97
SERVMOD_3V3: IC1.5 IC1.6 IC1.12 IC1.13 R43.1 R45.2 | length 519.9
  TopLayer w6: IC1.12@10796.26,6289.37 IC1.13@10796.26,6263.78 10853.35,6263.78 10955.71,6366.14 IC1.6@11024.61,6366.14 IC1.5@11024.61,6340.55 11044.29,6340.55 IC1.5@11049.15,6345.41
  TopLayer w8: IC1.6@11024.61,6366.14 R43.1@11136.02,6366.14 R45.2@11136.02,6426.18
STRIP1: C1.1 M1.1 M2.1 R8.1 R63.2 | length 449
  TopLayer w25: M2.1@4139.08,6217.52 4142.03,6214.57 4316.93,6214.57 R8.1@4319.88,6211.61 ; M1.1@4140.55,9718.5 C1.1@4330.13,9718.5
  TopLayer w27.56: v2(5512.8,6075.16) R63.2@5512.8,6151.31
STRIP2: R62.1 | length 49.2
  BottomLayer w30: 6722.97,6101.78 R62.1@6722.97,6150.95
  other v2: 5855.31,6073.82 5810.12,6074.79 7885.83,6076.77 7933.15,6076.76
STRIP3: R63.1 | length 57.1
  TopLayer w35.43: R63.1@5589.65,6150 v2(5646.73,6150)
  other v2: 12324.08,6072 8722.44,6073.82 8763.86,6073.8
pads on no net: D9.3 D9.4 D10.3 D10.4 D11.4 D11.5 D12.4 D12.5 FTG21.FTG2 FTG22.1 FTG23.1 FTG24.1 IC5.4 IC20A.2 IC20B.2 IC20C.2 IC20D.2 IC20E.2 IC20F.2 IC20G.2 IC20H.2 IC20I.2 IC20J.2 IC20K.2 IC20L.2 IC20M.2 IC20N.2 IC20O.2 IC20P.2 IC23.13 IC24.7 IC25.13 IC26.7 IC27.4 J1.A5 J1.B1 J1.B5 J1.D5 J1.E4 J1.E5 J1.F4 J1.G3 J1.H3 J1.I2 J1.J3 J1.K3 J1.L2 J1.L3 J2.A3 J2.A5 J2.A6 J2.A7 J2.A8 J2.B2 J2.B3 J2.B4 J2.B5 J2.B6 J2.B7 J2.B8 J2.C2 J2.C4 J2.C6 J2.C8 J2.D3 J2.D5 J2.D6 J2.D7 J2.D8 J2.E2 J2.E3 J2.E4 J2.E5 J2.E6 J2.E7 J2.E8 J2.F2 J2.F4 J2.F6 J2.F8 J2.G3 J2.G5 J2.G6 J2.G7 J2.H2 J2.H3 J2.H4 J2.H5 J2.H6 J2.H7 J2.H8 J2.I2 J2.I4 J2.I6 J2.I8 J2.J3 J2.J5 J2.J7 J2.K2 J2.K3 J2.K4 J2.K5 J2.K6 J2.K7 J2.K8 J2.L2 J2.L4 J2.L6 J2.L8 J15.M1 J15.M2

## Polygon pours and split planes (outlines as drawn)
no net on TopLayer "copper_balance_top" (solid, pour order 20): 4027.15,9858.28 12599.56,9858.28 12599.56,8086.03 12599.45,7741.54 12599.56,7741.54 12599.56,6078.86 3981.49,6078.86 3981.49,6287.3 3922.03,6346.75 3922.03,9495.61 3960.64,9534.22 3960.64,9791.77
STRIP1 on TopLayer "esd1" (solid, remove dead copper, pour order 0): 4042.32,6187.01 4237.2,6187.01 4237.2,6103.9 5591.61,6103.9 5591.61,6044.84 4042.32,6044.84
P3V3_CPCIS on TopLayer "P3V3_CPCIS_L01_P019" (solid, pour order 19): 9520.67,6788.39 9520.67,6712.6 9501.97,6693.9 9428.15,6693.9 9416.34,6705.71 9416.34,6823.82 9426.59,6839.2 9441.97,6849.45 9916.47,6849.45 9925.33,6843.7 9931.8,6835.72 9935.03,6772.25 9984.61,6724.61 10128.32,6663.02 10128.32,6615.92 10074.78,6615.92 10074.78,6616.28 9836.61,6615.92 9836.61,6788.39
STRIP2 on TopLayer "esd1" (solid, pour order 3): 7281.9,6050.18 7953.82,6050.18 7953.82,6100.15 5788.46,6100.15 5788.46,6050.18
STRIP3 on TopLayer "STRIP3_L01_P005" (solid, pour order 5): 12581.11,6050.18 12581.78,6050.18 12630.6,6099 8701.77,6099 8701.77,6050.18
no net on BottomLayer "copper_balance_bot" (solid, pour order 18): 4028.58,9859.71 12638.92,9859.71 12638.92,8125.39 12638.81,7780.9 12638.92,7780.9 12638.92,6118.22 4020.85,6118.22 4020.85,6326.66 3961.39,6386.11 3961.39,9534.98 4000,9573.58 4000,9831.13
STRIP1 on BottomLayer "esd1" (solid, pour order 7): 4032.48,6259.42 4237.2,6259.42 4237.2,6104.31 5589.76,6104.31 5589.76,6045.26 4032.48,6045.26
STRIP2 on BottomLayer "esd1" (solid, pour order 4): 7281.9,6050.18 7953.82,6050.18 7953.82,6100.15 5788.46,6100.15 5788.46,6050.18
STRIP3 on BottomLayer "STRIP3_L04_P006" (solid, pour order 6): 12581.11,6050.18 12581.78,6050.18 12630.6,6099 8701.77,6099 8701.77,6050.18
GND on MidLayer1 (split plane): 4807.54,8523.3 4807.54,6119.62 4021.07,6119.62 4021.07,6306.73 4021.03,6307.07 4021.03,6307.09 4021.03,6336.76 4020.65,6340.68 4019.5,6344.45 4017.65,6347.93 4015.15,6350.97 3926.38,6439.74 3926.36,8685.44 4645.4,8685.44
P3V3 on MidLayer1 (split plane): 4452.08,8773.62 4452.34,8771.66 4453.09,8769.84 4454.3,8768.27 4455.86,8767.07 4457.69,8766.32 4459.65,8766.06 5038.21,8766.06 5106.61,8697.65 5106.61,6455.41 5106.87,6453.45 5107.62,6451.63 5108.82,6450.06 5135.1,6423.79 5135.1,6423.78 5136.67,6422.58 5137.42,6422.27 5138.49,6421.83 5140.45,6421.57 8214.57,6421.57 8216.52,6421.83 8218.35,6422.58 8219.92,6423.78 8221.12,6425.35 8221.87,6427.18 8222.13,6429.13 8222.13,6570.69 8265.93,6614.48 8430.92,6614.48 8439.29,6606.11 8439.29,6429.13 8439.29,6119.77 4822.67,6119.77 4822.67,8526.43 4822.41,8528.39 4821.65,8530.22 4820.45,8531.78 4653.88,8698.35 4652.32,8699.55 4650.49,8700.31 4648.54,8700.56 4648.53,8700.56 3926.36,8700.56 3926.35,9474.22 3926.35,9489.23 4023.56,9586.44 4452.08,9586.44
P3V3 on MidLayer1 (split plane): 8451.78,6104.9 8453.74,6104.64 12644.87,6104.64 12644.87,6086.22 12576.72,6018.08 4021.07,6018.08 4021.07,6104.49 4815.1,6104.49 4816.22,6104.64 8441.93,6104.64 8443.89,6104.9 8444.39,6105.11 8444.89,6104.9 8446.85,6104.64 8448.81,6104.9 8450.3,6105.51
P12V0_CPCIS on MidLayer1 (split plane): 9581.02,6512.98 9538.94,6470.9 9537.74,6469.33 9536.98,6467.51 9536.73,6465.55 9536.73,6256.89 9536.98,6254.93 9537.74,6253.11 9538.94,6251.54 9564.04,6226.44 9565.61,6225.24 9567.43,6224.48 9569.39,6224.23 11677.66,6224.23 12644.87,6224.23 12644.87,6119.77 8826.46,6119.77 8826.46,6481.61 9294.29,6481.61 9296.25,6481.87 9298.07,6482.62 9299.64,6483.82 9419.96,6604.15 9581.02,6604.15
GND on MidLayer1 (split plane): 12644.87,9850.79 12644.87,6239.36 11677.66,6239.36 9572.52,6239.36 9551.86,6260.02 9551.86,6462.42 9593.93,6504.49 9595.13,6506.06 9595.89,6507.88 9596.15,6509.84 9596.15,6611.71 9595.89,6613.67 9595.13,6615.49 9593.93,6617.06 9592.36,6618.26 9590.54,6619.02 9588.58,6619.28 9416.83,6619.28 9414.87,6619.02 9413.05,6618.26 9411.48,6617.06 9291.16,6496.74 8818.9,6496.74 8816.94,6496.48 8815.12,6495.72 8813.55,6494.52 8812.35,6492.96 8811.59,6491.13 8811.33,6489.17 8811.33,6119.77 8454.42,6119.77 8454.42,6429.13 8454.42,6609.25 8454.16,6611.21 8453.4,6613.03 8452.2,6614.6 8439.4,6627.4 8437.83,6628.6 8437.08,6628.91 8436.01,6629.35 8434.05,6629.61 8262.79,6629.61 8260.84,6629.35 8259.01,6628.6 8257.45,6627.4 8257.44,6627.4 8209.22,6579.17 8208.02,6577.6 8207.26,6575.78 8207,6573.82 8207,6436.7 5143.58,6436.7 5121.74,6458.54 5121.74,8700.79 5121.48,8702.75 5121.04,8703.81 5120.72,8704.57 5119.52,8706.14 5046.69,8778.97 5045.12,8780.17 5043.3,8780.93 5041.34,8781.19 4467.21,8781.19 4467.21,9594.01 4466.95,9595.96 4466.2,9597.79 4464.99,9599.36 4463.43,9600.56 4461.6,9601.31 4459.65,9601.57 4020.43,9601.57 4020.42,9601.57 4018.47,9601.31 4018.11,9601.17 4018.11,9918.93 12576.72,9918.93
GND on Internal Plane 1 (split plane): 12644.87,9850.79 12644.87,6086.22 12576.72,6018.08 8796.34,6018.08 8796.34,6111.2 8795.96,6113.12 8794.87,6114.75 8793.25,6115.84 8791.33,6116.22 5720.87,6116.22 5652.07,6185.02 5650.45,6186.11 5648.53,6186.49 5562.98,6186.49 5561.06,6186.11 5559.43,6185.02 5558.34,6183.39 5557.96,6181.47 5557.96,6018.08 4021.07,6018.08 4021.07,6306.73 4021.03,6307.07 4021.03,6307.09 4021.03,6336.76 4020.65,6340.68 4019.5,6344.45 4017.65,6347.93 4015.15,6350.97 3926.38,6439.74 3926.35,9474.22 3926.35,9497.23 4012.23,9583.11 4014.73,9586.16 4016.58,9589.63 4017.73,9593.4 4018.11,9597.32 4018.11,9918.93 12576.72,9918.93
STRIP3 on Internal Plane 1 (split plane): 5715.25,6107.66 5716.87,6106.57 5718.79,6106.19 8786.31,6106.19 8786.31,6018.08 5568,6018.08 5568,6176.45 5646.45,6176.45

## Other copper
TopLayer:
  rectangle net GND: 12118.02,7900.5 12649.02,8037.5
  rectangle net GND: 4721.46,8534.45 4738.19,8554.13
  region net GND: 9820.87,6762.8 9819.89,6761.81 9691.41,6760.85 9690.22,6757.84 9687.44,6755.89 9606.3,6756.54 9606.3,6704.73 9592.52,6704.73 9571.85,6684.06 9511.81,6684.06 9500.27,6672.51 9500.27,6633.79 9523.55,6633.79 9523.63,6633.86 9523.63,6662.4 9602.36,6662.4 9614.34,6655.36 9619.1,6649.53 9619.1,6607.29 9602.37,6590.55 9602.37,6534.45 9700.43,6534.35 9705.57,6538.36 9709.65,6543.57 9709.65,6610.24 9820.87,6721.46 9820.87,6724.41
  region net P12V0: 8723.04,6376.68 8722.08,6378.72 8718.65,6384.27 8710.93,6387.5 8588.44,6387.5 8580.26,6395.68 8490.91,6395.68 8490.1,6396.11 8489.72,6396.87 8489.72,6398.94 8488.9,6400.23 8484.49,6401.9 8473.42,6401.9 8473.42,6404.19 8473.42,6411.89 8473.42,6413.65 8482.05,6413.72 8487.68,6415.41 8489.31,6416.93 8489.72,6417.79 8489.72,6419.05 8490.21,6419.86 8491.6,6420.27 8524.16,6420.27 8528.38,6421.53 8530.38,6423.53 8552.57,6445.72 8720.42,6445.72 8726.03,6448.23 8728.71,6452.16 8741.2,6470.48 8811.11,6470.48 8811.11,6333.54 8810.25,6332.69 8740.86,6332.69
  region net P12V0_CPCIS: 9582.68,6511.81 9582.68,6601.38 9446.85,6601.38 9446.85,6511.81
  region net P12V0_CPCIS: 8925.51,6333.66 8826.77,6333.66 8826.77,6471.46 8926.37,6471.46
  region net GND: 8474.72,6394 8430.12,6394 8430.12,6222.33 8444.84,6222.33 8573.83,6222.33 8643.7,6292.21 8643.7,6358.96 8592.81,6358.96 8569.67,6382.1 8474.72,6382.1
  region net P3V3: 8400.59,6341.54 8365.94,6341.54 8311.71,6287.31 8058.07,6287.31 8058.07,6208.42 8311.71,6208.7 8311.71,6222.48 8400.59,6222.48
  region net NetIC27_9: 8173.16,6334.58 8310.96,6334.58 8310.96,6384.52 8328.31,6401.87 8392.04,6401.87 8392.04,6413.32 8364.13,6413.32 8173.16,6413.32
  region net GND: 8415.36,6460.93 8364.49,6460.93 8364.49,6544.95 8415.35,6544.95
BottomLayer:
  region net GND: 12648.34,8036.49 12117.34,8036.49 12117.34,7899.49 12648.34,7899.49
  rectangle net GND: 4903.19,6528.98 4921.26,6552.04
  rectangle net GND: 4891.73,7653.93 4911.42,7675.58
  rectangle net GND: 4721.46,6724.25 4739.17,6740.16
  rectangle net GND: 4892.72,7241.14 4921.26,7263.78
Internal Plane 1 (plane layer: these items are gaps in the copper):
  lines w9.84: 5562.98,6011.11 5562.98,6181.47 5648.53,6181.47 5718.79,6111.2 ; 8791.33,6011.11 8791.33,6111.2 ; 5718.79,6111.2 8791.33,6111.2 ; 5718.79,6111.2 8791.33,6111.2
MidLayer1 (plane layer: these items are gaps in the copper):
  lines w15: 4000.18,6114.35 4002.47,6112.06 4815.1,6112.06 4815.1,8526.43 4648.54,8693 3908.27,8693 3908.27,9481.85 4020.42,9594.01 4053.51,9594.01 4459.65,9594.01 4459.65,8773.62 5041.34,8773.62 5114.17,8700.79 5114.17,6455.41 5140.45,6429.13 8214.57,6429.13 8214.57,6573.82 8262.79,6622.05 8434.05,6622.05 8446.85,6609.25 8446.85,6429.13 8446.85,6112.2 ; 4815.1,6112.2 8441.93,6112.2 ; 8453.74,6112.2 8818.9,6112.2 8818.9,6489.17 9074.3,6489.17 9294.29,6489.17 9416.83,6611.71 9588.58,6611.71 9588.58,6509.84 9544.29,6465.55 9544.29,6256.89 9569.39,6231.79 11677.66,6231.79 12663.39,6231.79 12663.39,7185.04 12656.99,7191.44 ; 8803.15,6112.2 12654.53,6112.2

## Silkscreen, mask and mechanical layers (free items; w line width, h text height)
TopOverlay:
  drawing of 1254 lines, arcs and shapes, not listed
  text "GND" at 5086.61,9786.42 h39.37
  text "DIO RJ45_v1.2_DIOT" at 8052.17,9785.43 h60
  text "EEM" at 9967.52,9775.59 h20
  text "DIOT" at 10054.58,9772.82 h20
  text "7" at 5575.79,9635.83 h35
  text "6" at 5575.79,9591.54 h35
  text "5" at 5575.79,9540.35 h35
  text "4" at 5575.79,9486.22 h35
  text "3V3_MP2" at 10574.8,9459.65 h39.37 r270
  text "3V3_MP1" at 9753.94,9454.72 h39.37 r270
  text "GND" at 10947.83,9446.85 h39.37
  text "3" at 5575.79,9437.99 h35
  text "2" at 5575.79,9388.78 h35
  text "INPUTS" at 5505.91,9369.09 h40 r90
  text "OUTPUTS" at 6231.3,9342.52 h40 r90
  text "1" at 5587.45,9340.55 h35
  text "SDA2" at 10432.27,9312.03 h39.37 r270
  text "SCL2" at 10319.88,9311.02 h39.37 r270
  text "SDA1" at 9500,9300.2 h39.37 r270
  text "SCL1" at 9605.32,9297.24 h39.37 r270
  text "0" at 5575.79,9288.39 h35
  text "WUT ISE 2024" at 8494.09,9280.51 h40
  text "DIR CTRL" at 5725.39,9207.68 h40
  text "15" at 5546.63,9121.06 h35
  text "14" at 5546.63,9071.85 h35
  text "13" at 5546.63,9023.62 h35
  text "12" at 5546.63,8972.44 h35
  text "11" at 5558.29,8923.23 h35
  text "INPUTS" at 5505.91,8884.84 h40 r90
  text "10" at 5546.63,8875 h35
  text "OUTPUTS" at 6231.3,8842.52 h40 r90
  text "9" at 5575.79,8822.83 h35
  text "8" at 5575.79,8770.67 h35
  text "ONLY SHIELDED  / STP cables /  / LIVE switching  / may lead to damage" at 5361.22,8703.74 h59.06 r90
  text "CH 0..3" at 4694.88,8277.56 h39.37 r90
  text "CH 4..7" at 4694.88,7657.48 h39.37 r90
  text "EEM0 CH0...7" at 11526.57,7640.75 h40 r90
  text "EEM1 CH8...15" at 10761.81,7604.33 h40 r90
  text "CH 8..11" at 4694.88,7097.25 h39.37 r90
  text "CH 12..15" at 4694.88,6553.2 h39.37 r90
  text "3V3" at 4721.6,6349.09 h39.37
  text "3V3" at 5244.09,6290.35 h39.37
  text "P12V0_CPCIS" at 8849.5,6287.57 h30
  text "P12V0" at 8656.59,6284.54 h30
  text "GND" at 5871.06,6249.02 h39.37
  text "12V" at 5251.97,6189.96 h39.37
  text "12V" at 4732.28,6131.89 h39.37
BottomOverlay:
  drawing of 1247 lines, arcs and shapes, not listed
  text "GND" at 4944.88,9785.43 h39.37
  text "3V3_MP2" at 10611.22,9476.38 h39.37 r90
  text "3V3_MP1" at 9793.31,9455.71 h39.37 r90
  text "GND" at 11049.21,9446.85 h39.37
  text "SCL2" at 10352.36,9311.02 h39.37 r90
  text "SDA2" at 10473.43,9306.1 h39.37 r90
  text "SCL1" at 9638.78,9300.2 h39.37 r90
  text "SDA1" at 9534.45,9298.23 h39.37 r90
  text "DIO RJ45_v1.2_DIOT" at 9169.29,9240.16 h60
  text "3V3" at 5121.07,6290.52 h39.37
  text "GND" at 5974.41,6241.14 h39.37
  text "12V" at 5118.11,6188.98 h39.37
TopSolder:
  rectangle: 4022.55,6025.74 12657.21,6096.5
  region: 12117.44,8037.83 12117.44,7900.03 12667.15,7900.03 12667.15,8037.83
BottomSolder:
  rectangle: 4023.44,6025.94 12657.25,6096.69
  region: 12117.87,8037.39 12117.87,7899.6 12667.59,7899.6 12667.59,8037.39
Mechanical1:
  lines w3.94: 3908.27,6432.28 3908.27,9474.22 ; 4000,9596.46 4000,9933.03 ; 4002.95,6000 4002.95,6280.51 4002.95,6307.09
  lines w4: 3908.27,6432.28 4002.95,6337.6 4002.95,6307.09 ; 3908.27,9474.22 3908.27,9503.52 3908.27,9504.72 4000,9596.46 ; 4000.01,9937.01 12584.21,9937.01 12662.95,9858.28 12662.95,6078.73 ; 4002.95,6000 12584.21,6000 ; 12584.21,6000 12662.95,6078.73 ; 12584.21,6000 12662.95,6078.73
DrillDrawing:
  drawing of 295 lines, arcs and shapes, not listed
  text "Layer" at 6574.45,11924.45 h60
  text "Name" at 6984.37,11924.45 h60
  text "Material" at 8004.08,11924.45 h60
  text "Thickness" at 8863.85,11924.45 h60
  text "Constant" at 9513.68,11924.45 h60
  text "Board Layer Stack" at 10083.55,11924.45 h60
  text "TopOverlay" at 6984.37,11804.45 h60
  text "TopSolder" at 6984.37,11684.45 h60
  text "Solder Resist" at 8004.08,11684.45 h60
  text "2,09mil" at 8863.85,11684.45 h60
  text "3.5" at 9513.68,11684.45 h60
  text "1" at 6574.45,11564.45 h60
  text "TopLayer" at 6984.37,11564.45 h60
  text "1,40mil" at 8863.85,11564.45 h60
  text "Dielectric1" at 6984.37,11444.45 h60
  text "FR-4" at 8004.08,11444.45 h60
  text "14,17mil" at 8863.85,11444.45 h60
  text "4.8" at 9513.68,11444.45 h60
  text "2" at 6574.45,11324.45 h60
  text "MidLayer1" at 6984.37,11324.45 h60
  text "1,40mil" at 8863.85,11324.45 h60
  text "Dielectric4" at 6984.37,11204.45 h60
  text "FR-4" at 8004.08,11204.45 h60
  text "12,60mil" at 8863.85,11204.45 h60
  text "4.8" at 9513.68,11204.45 h60
  text "3" at 6574.45,11084.45 h60
  text "Internal Plane 1" at 6984.37,11084.45 h60
  text "1,42mil" at 8863.85,11084.45 h60
  text "Dielectric2" at 6984.37,10964.45 h60
  text "FR-4" at 8004.08,10964.45 h60
  text "14,17mil" at 8863.85,10964.45 h60
  text "4.2" at 9513.68,10964.45 h60
  text "4" at 6574.45,10844.45 h60
  text "BottomLayer" at 6984.37,10844.45 h60
  text "1,40mil" at 8863.85,10844.45 h60
  text "BottomSolder" at 6984.37,10724.45 h60
  text "Solder Resist" at 8004.08,10724.45 h60
  text "2,09mil" at 8863.85,10724.45 h60
  text "3.5" at 9513.68,10724.45 h60
  text "BottomOverlay" at 6984.37,10604.45 h60

## Text inside footprints (layer, text, board x,y; h text height)
J1: TopOverlay "6" at 11793.31,6557.09 h39.37 r90; TopOverlay "5" at 11793.31,6478.35 h39.37 r90; TopOverlay "4" at 11793.31,6399.61 h39.37 r90; TopOverlay "3" at 11793.31,6320.87 h39.37 r90; TopOverlay "2" at 11793.31,6242.13 h39.37 r90; TopOverlay "1" at 11793.31,6163.39 h39.37 r90; TopOverlay "L" at 11995.08,6644.69 h39.37 r90; TopOverlay "K" at 12050.2,6644.69 h39.37 r90; TopOverlay "J" at 12105.31,6644.69 h39.37 r90; TopOverlay "I" at 12160.43,6654.53 h39.37 r90; TopOverlay "H" at 12215.55,6644.69 h39.37 r90; TopOverlay "G" at 12270.67,6644.69 h39.37 r90; TopOverlay "F" at 12325.79,6644.69 h39.37 r90; TopOverlay "E" at 12380.91,6644.69 h39.37 r90; TopOverlay "D" at 12436.02,6644.69 h39.37 r90; TopOverlay "C" at 12493.11,6684.06 h39.37 r90; TopOverlay "B" at 12548.23,6684.06 h39.37 r90; TopOverlay "A" at 12603.35,6684.06 h39.37 r90; DrillDrawing "Diam. 0.5mm +/-0.05" at 12608.27,6728.35 h39.37 r180; DrillDrawing "PRESS-FIT TECHNOLOGY" at 12608.27,6669.29 h39.37 r180; Mechanical14 "6" at 11793.31,6557.09 h39.37 r90; Mechanical14 "5" at 11793.31,6478.35 h39.37 r90; Mechanical14 "4" at 11793.31,6399.61 h39.37 r90; Mechanical14 "3" at 11793.31,6320.87 h39.37 r90; Mechanical14 "2" at 11793.31,6242.13 h39.37 r90; Mechanical14 "1" at 11793.31,6163.39 h39.37 r90; Mechanical14 "L" at 11992.13,6090.55 h39.37 r90; Mechanical14 "K" at 12047.24,6090.55 h39.37 r90; Mechanical14 "J" at 12102.36,6090.55 h39.37 r90; Mechanical14 "I" at 12157.48,6100.39 h39.37 r90; Mechanical14 "H" at 12212.6,6090.55 h39.37 r90; Mechanical14 "G" at 12267.72,6090.55 h39.37 r90; Mechanical14 "F" at 12322.83,6090.55 h39.37 r90; Mechanical14 "E" at 12377.95,6090.55 h39.37 r90; Mechanical14 "D" at 12433.07,6090.55 h39.37 r90; Mechanical14 "C" at 12488.19,6051.18 h39.37 r90; Mechanical14 "B" at 12543.31,6051.18 h39.37 r90; Mechanical14 "A" at 12598.43,6051.18 h39.37 r90; Mechanical8 "Edge of Daugher Card" at 12690.94,6247.05 h19.68 r90; Mechanical8 "Top Surface of Mother Board" at 13143.7,6201.77 h19.68 r90